# Altium PCB PCB_OpenT12_精简_2021-10-22.pcbdoc
Units mil, origin at the board's own origin, x right, y up, seen from the top; angles counter-clockwise.
Board outline 4690 x 3345 mil, 2 copper layers (Top Layer, Bottom Layer); 92 components, 71 nets, 286 pads, 36 vias.
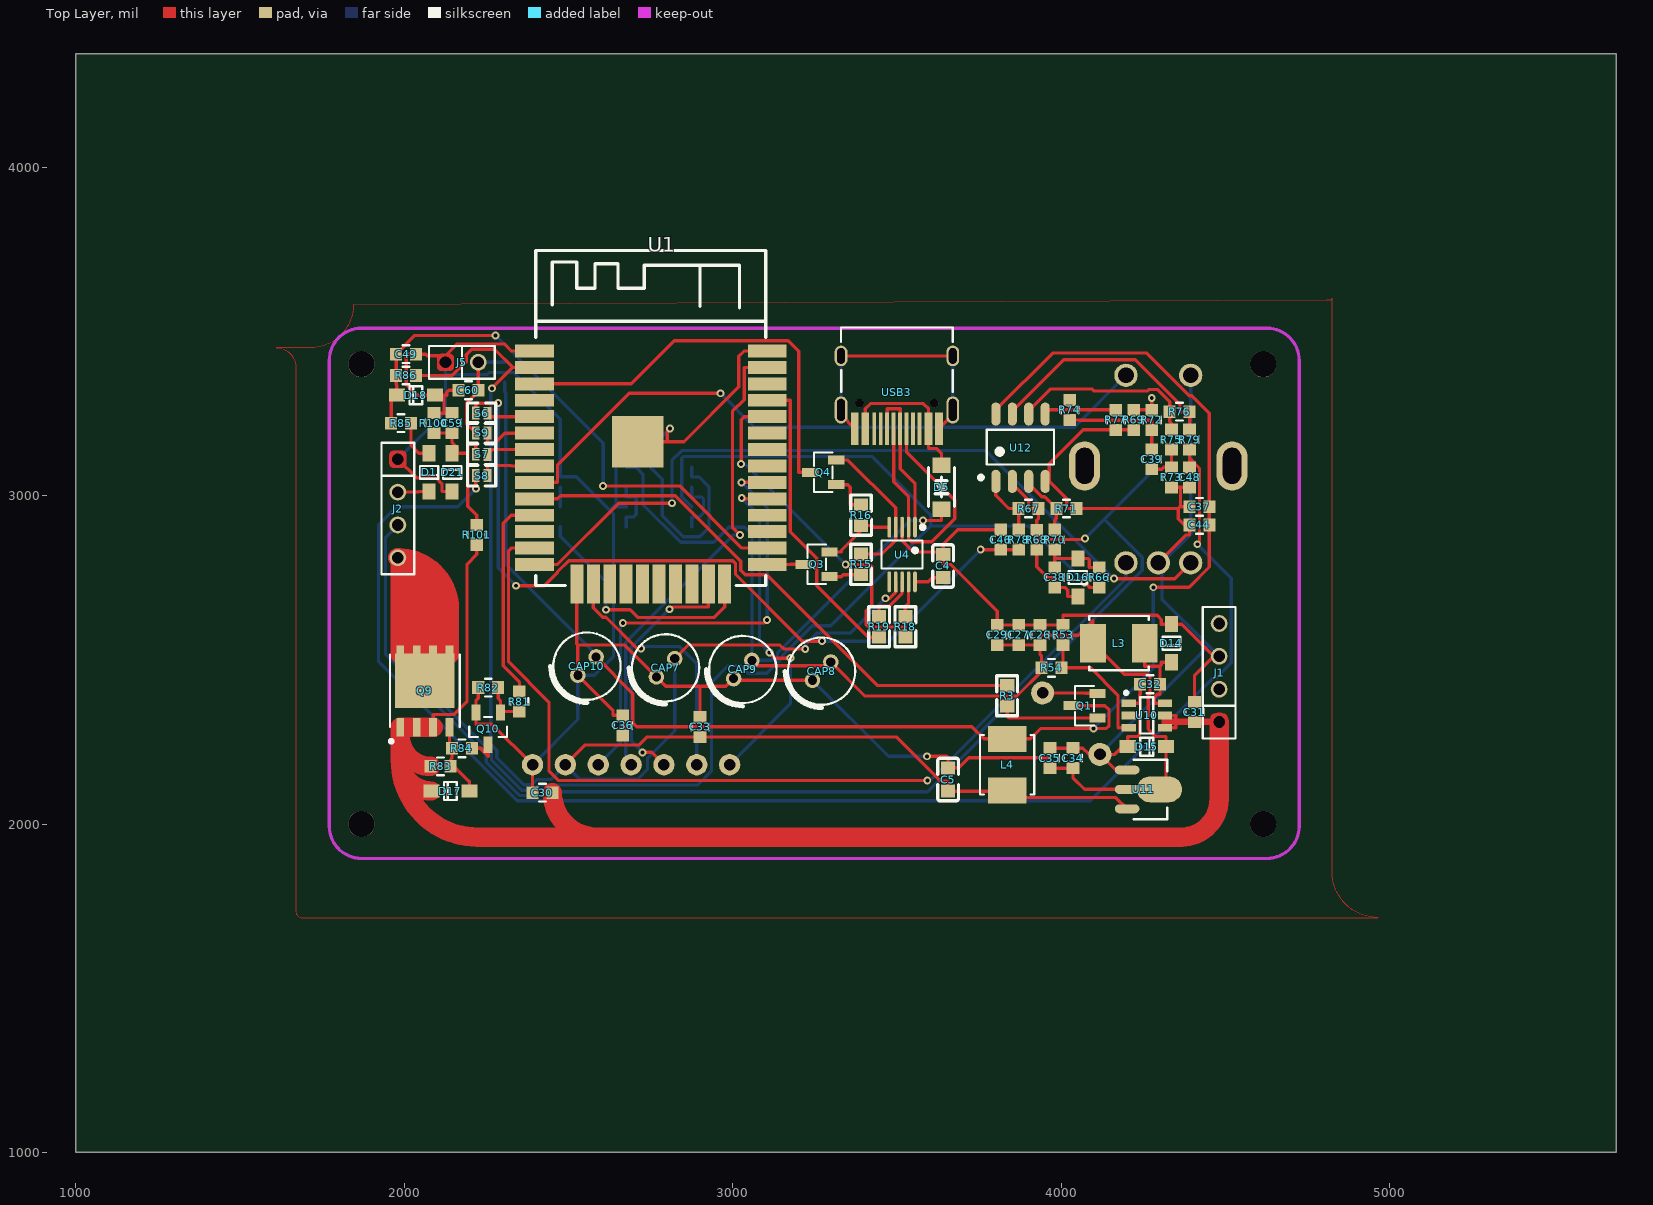
[diagram p0: Top Layer view]
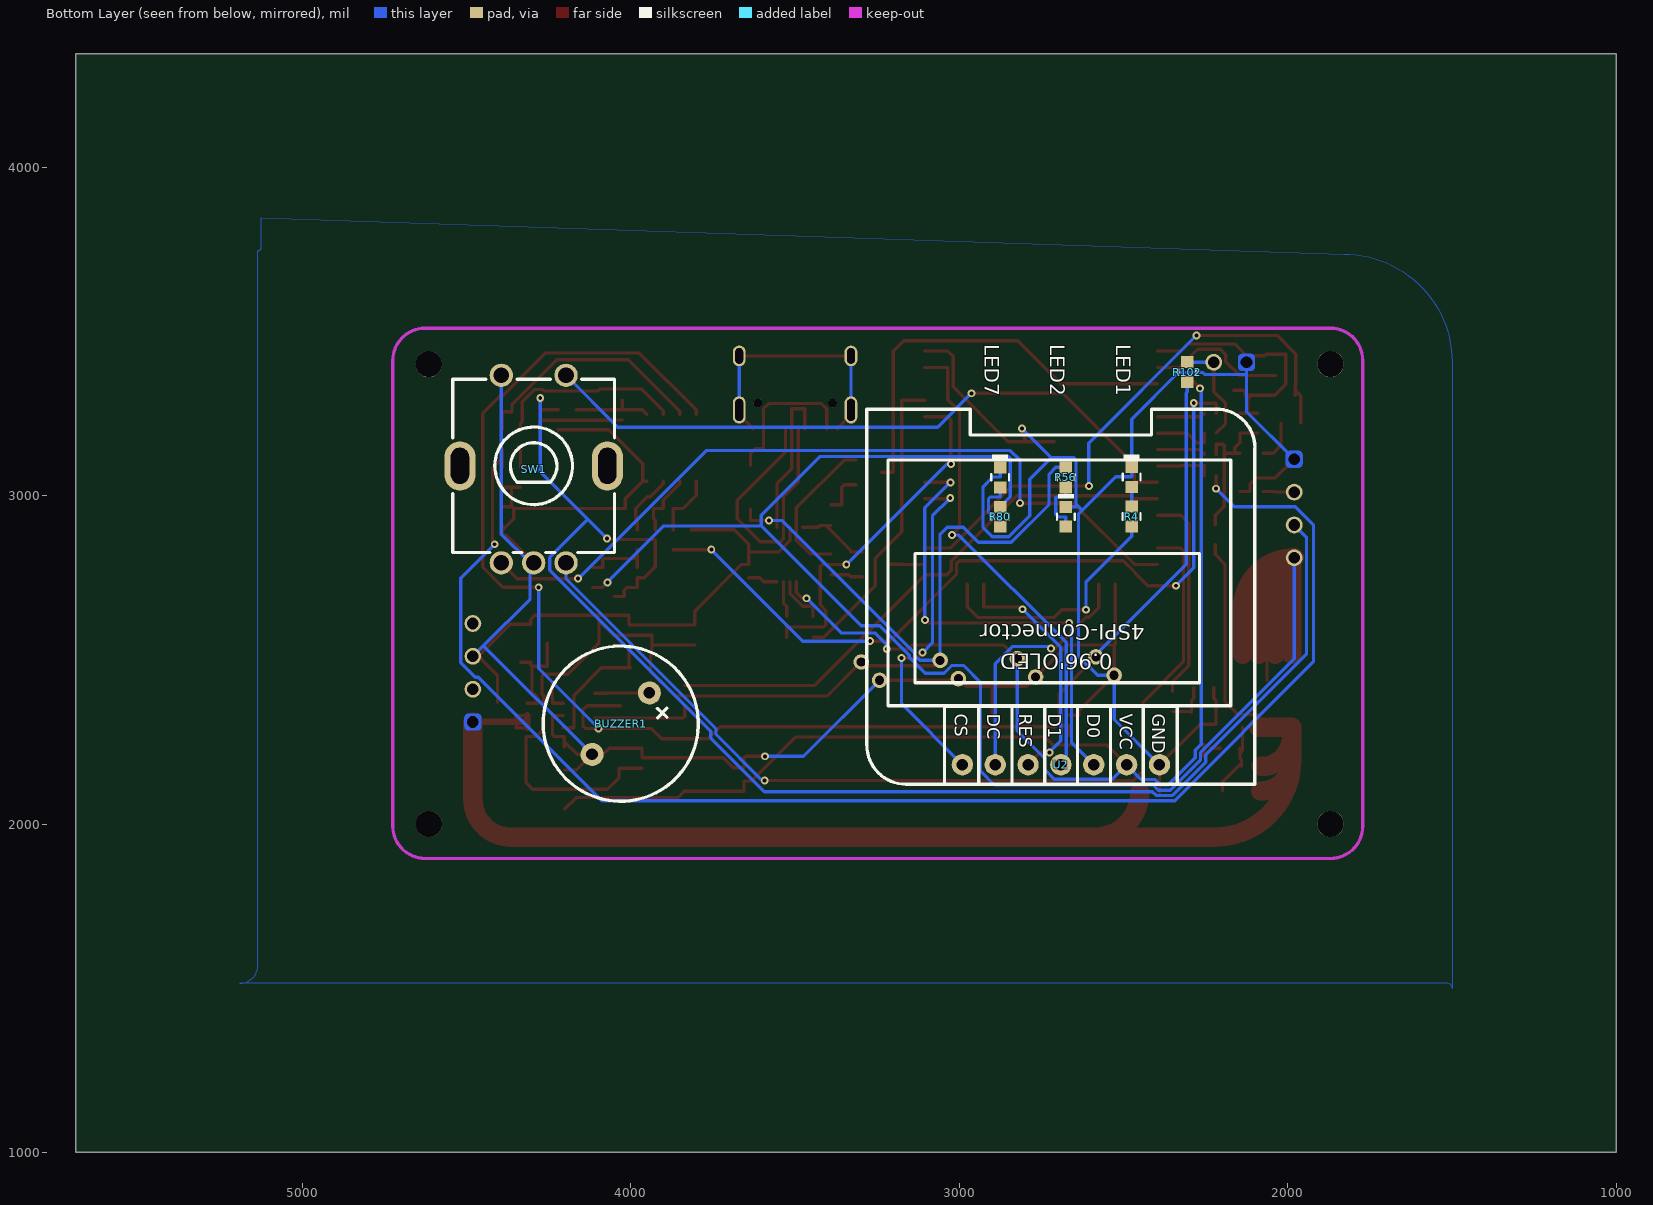
[diagram p1: Bottom Layer view, seen from below]

## Layer stack, top to bottom
Top Layer: signal copper (thickness not stored)
Dielectric: dielectric 12.6, FR-4, Dk 4.8
Bottom Layer: signal copper (thickness not stored)

## Board outline
5690,1000 1000,1000 1000,4345 5690,4345

## Components (designator, comment, footprint, x,y, rotation, side; value= is the part's Value field where it differs from the comment)
BUZZER1 "GMC1205YA-16R2048" BUZ-TH_BD12.0-P6.50-D0.6-FD 4030.78,2305.4 r133 bottom
C4 "1u" C0603 3640.78,2785.4 r90 top
C5 "10u" C0603 3655.78,2135.4 r270 top
C26 "10uF" LC-0603-C 3935.78,2575.4 r90 top
C27 "10uF" LC-0603-C 3870.78,2575.4 r90 top
C29 "0.1uF" LC-0603-C 3805.78,2575.4 r90 top
C30 "4.7uF" LC-0603-C 2420.78,2095.4 r180 top
C31 "0.1uF" LC-0603-C 4405.78,2340.4 r90 top
C32 "0.1uF" LC-0603-C 4270.78,2425.4 r180 top
C33 "0.1uF" LC-0603-C 2900.78,2295.4 r270 top
C34 "0.1uF" LC-0603-C 4035.78,2200.4 r270 top
C35 "0.1uF" LC-0603-C 3965.78,2200.4 r90 top
C36 "0.1uF" LC-0603-C 2665.78,2300.4 r270 top
C37 "0.1uF" LC-0603-C 4420.78,2965.4 r0 top
C38 "0.1uF" LC-0603-C 3980.78,2750.4 r270 top
C39 "0.1uF" LC-0603-C 4275.78,3110.4 r270 top
C44 "4.7uF" LC-0603-C 4420.78,2910.4 r0 top
C46 "10nF" LC-0603-C 3815.78,2865.4 r90 top
C48 "10nF" LC-0603-C 4390.78,3055.4 r270 top
C49 "0.1uF" LC-0603-C 2005.78,3430.4 r180 top
C59 "1uF" LC-0603-C 2145.78,3220.4 r90 top
C60 "1uF" LC-0603-C 2195.78,3320.4 r180 top
CAP7 "22uF" CAPX-5.0 2795.78,2475.4 r45 top
CAP8 "22uF" CAPX-5.0 3270.78,2465.4 r45 top
CAP9 "100uF" CAPX-5.0 3030.78,2470.4 r45 top
CAP10 "22uF" CAPX-5.0 2556.46,2480.72 r45 top
D1 "1N4148" LC-SOD-123 2075.78,3070.4 r90 top
D5 "1N5819HW-7-F" SOD-123_L2.8-W1.8-LS3.7-FD 3635.78,3025.4 r270 top
D14 "B5819" LC-SOD-123 4335.78,2550.4 r90 top
D15 "SMA6.0A" LC-SOD-123 4260.78,2235.4 r180 top
D16 "1N4148" LC-SOD-123 4050.78,2750.4 r90 top
D17 "ZMM12" LC-SOD-123 2140.78,2100.4 r0 top
D18 "SMF3.3A" LC-SOD-123 2035.78,3305.4 r0 top
D21 "SMF3.3A" LC-SOD-123 2145.78,3070.4 r270 top
J1 "CONN4" SIP-4 4480.78,2310.4 r90 top
J2 "CONN4" SIP-4 1980.78,3110.4 r270 top
J5 "NTC 10K" SIP-2 2125.78,3405.4 r0 top
L3 "22uH" LIN0520 4175.78,2550.4 r180 top
L4 "22uH" LIN0520 3835.78,2180.4 r90 top
LED1 "LED" LC-0603-LED 2475.38,3055.8 r90 bottom
LED2 "LED" LC-0603-LED 2675.78,2935.4 r90 bottom
LED7 "LED" LC-0603-LED 2875.78,3055.4 r90 bottom
Q1 "S8050" SOT-23-3_L2.9-W1.3-P1.90-LS2.4-BR 4070.78,2360.4 r0 top
Q3 "S8050" SOT-23-3_L2.9-W1.3-P1.90-LS2.4-BR 3255.78,2790.4 r0 top
Q4 "S8050" SOT-23-3_L2.9-W1.3-P1.90-LS2.4-BR 3275.78,3070.4 r0 top
Q9 "NCE40P13" DFN8-5*6 2063.1,2405.4 r0 top
Q10 "S8050" LC-SOT-23(SOT-23-3) 2255.78,2290.4 r90 top
R3 "10k" R0603 3835.78,2390.4 r90 top
R4 "2K" LC-0603-R#1 2475.42,2935.76 r90 bottom
R15 "10k" R0603 3390.78,2790.4 r90 top
R16 "10k" R0603 3390.78,2940.4 r270 top
R18 "220R" R0603 3525.78,2600.4 r270 top
R19 "220R" R0603 3445.78,2600.4 r270 top
R53 "2K" LC-0603-R#2 4005.78,2575.4 r270 top
R54 "10K" LC-0603-R#2 3970.78,2475.4 r180 top
R56 "3K" LC-0603-R#1 2675.78,3055.4 r270 bottom
R66 "10K" LC-0603-R#2 4115.78,2750.4 r90 top
R67 "200K" LC-0603-R#2 3900.78,2960.4 r180 top
R68 "2K" LC-0603-R#2 3925.78,2865.4 r270 top
R69 "0.02R" LC-0603-R#2 4220.78,3230.4 r270 top
R70 "2K" LC-0603-R#2 3980.78,2865.4 r90 top
R71 "200K" LC-0603-R#2 4015.78,2960.4 r0 top
R72 "10R" LC-0603-R#2 4275.78,3230.4 r90 top
R73 "10R" LC-0603-R#2 4335.78,3055.4 r270 top
R74 "1K" LC-0603-R#2 4025.78,3260.4 r90 top
R75 "1K" LC-0603-R#2 4335.78,3170.4 r90 top
R76 "20K" LC-0603-R#2 4360.78,3255.4 r180 top
R77 "20K" LC-0603-R#2 4165.78,3230.4 r270 top
R78 "1K" LC-0603-R#2 3870.78,2865.4 r90 top
R79 "10K" LC-0603-R#2 4390.78,3170.4 r90 top
R80 "10K" LC-0603-R#1 2875.78,2935.4 r90 bottom
R81 "1K" LC-0603-R#2 2350.78,2372.72 r270 top
R82 "51K" LC-0603-R#2 2255.78,2415.4 r0 top
R83 "10K" LC-0603-R#2 2110.78,2175.4 r180 top
R84 "2K" LC-0603-R#2 2175.78,2230.4 r180 top
R85 "1K" LC-0603-R#2 1990.78,3220.4 r180 top
R86 "10K" LC-0603-R#2 2005.78,3365.4 r180 top
R100 "1K" LC-0603-R#2 2090.78,3220.4 r270 top
R101 "10K" LC-0603-R#2 2220.78,2880.4 r270 top
R102 "10K" LC-0603-R#1 2305.78,3375.4 r90 bottom
S6 "Solder" SW_HAND_WELD_JX 2235.78,3250.4 r180 top
S7 "Solder" SW_HAND_WELD_JX 2235.78,3125.4 r180 top
S8 "Solder" SW_HAND_WELD_JX 2235.78,3060.4 r180 top
S9 "Solder" SW_HAND_WELD_JX 2235.78,3190.4 r180 top
SW1 "Rotary Enc" SW-TH_PEC11R-4XXXF-SXXXX 4295.78,3080.4 r0 bottom
U1 "ESP32-S" WIRELM-SMD_ESP32-S 2750.78,3085.4 r0 top
U2 "0.96OLED" "OLED 12864 SPI 7P" 2690.78,2180.4 r180 bottom
U4 "CH340E" MSOP-10_L3.0-W3.0-P0.50-LS5.0-BL 3515.78,2820.4 r180 top
U10 "HT7463B" LC-SOT-23-6 4260.78,2330.4 r180 top
U11 "HT7533" LC-SOT-89 4200.78,2105.4 r180 top
U12 "GS8552" LC-SOP-8-150MIL 3875.78,3145.4 r0 top
USB3 "USB-TYPEC-16P" USB-TYPE-C-16P 3670,3425 r180 top

## Footprints (in the part's own frame and the unit in brackets; to place one, negate y for a bottom-side part, rotate by r counter-clockwise, add the part's x,y. Pads: shape width x height; smd on the part's side, far side on the other; paste and mask are expansions set on the pad)
BUZ-TH_BD12.0-P6.50-D0.6-FD [mil]
  round 70 hole 35.4: 1(128,0) 2(-128,0)
  silkscreen extent -236,-236 236,236
C0603 [mm]
  rect 1x1.1 smd: 1(-0.9,0) 2(0.9,0)
  silkscreen extent -1.65,-0.8 1.65,0.8
CAPX-5.0 [mm]
  round 1.2 hole 0.7: 1(1,0) 2(-1,0)
  silkscreen extent -2.83,-2.6 2.6,2.6
DFN8-5*6 [mm]
  rect 0.6x1.4 smd: 1(-1.905,-2.816) 2(-0.635,-2.816) 3(0.635,-2.816) 4(1.905,-2.816) 5(1.905,2.816) 6(0.635,2.816) 7(-0.635,2.816) 8(-1.905,2.816)
  rect 4.6x4.2 smd: 5(0,0.791)
  silkscreen extent -2.7,-4 2.7,2.8
LC-0603-C [mm]
  rect 0.93x0.98 smd: 1(-0.77,0) 2(0.77,0)
  silkscreen extent -0.25,-0.69 0.25,0.69
LC-0603-LED [mm]
  rect 0.93x0.98 smd: A(-0.77,0) K(0.77,0)
  silkscreen extent -0.25,-0.69 1.72,0.69
LC-0603-R#1 [mm]
  rect 0.93x0.98 smd: 1(0.77,0) 2(-0.77,0)
  silkscreen extent -0.25,-0.69 0.25,0.69
LC-0603-R#2 [mm]
  rect 0.93x0.98 smd: 1(-0.77,0) 2(0.77,0)
  silkscreen extent -0.25,-0.69 0.25,0.69
LC-SOD-123 [mm]
  rect 1.25x1 smd: 1(1.475,0) 2(-1.475,0)
  silkscreen extent -0.5,-0.7 0.5,0.7
LC-SOP-8-150MIL [mm]
  oval 0.7x1.8 smd: 1(-1.893,-2.6) 2(-0.623,-2.6) 3(0.647,-2.6) 4(1.917,-2.6) 5(1.917,2.6) 6(0.647,2.6) 7(-0.623,2.6) 8(-1.893,2.6)
  silkscreen extent -3.2,-2.45 2.6,1.4
LC-SOT-23(SOT-23-3) [mm]
  rect 1.25x0.7 smd: 1(1.25,-0.95) 2(1.25,0.95) 3(-1.25,0)
  silkscreen extent -0.65,-1.46 0.9,1.46
LC-SOT-23-6 [mm]
  rect 1.1x0.6 smd: 1(1.4,-0.95) 2(1.4,0) 3(1.4,0.95) 4(-1.4,0.95) 5(-1.4,0) 6(-1.4,-0.95)
  silkscreen extent -0.5,-1.88 1.73,1.4
LC-SOT-89 [mm]
  oval 1.9x0.7 smd: 1(0,-1.5) 3(0,1.5)
  oval 3.5x2 smd: 2(-2.5,0)
  oval 2.1x0.7 smd: 2(-0.1,0)
  silkscreen extent -3.1,-2.3 -0.5,2.3
LIN0520 [mm]
  rect 2x3 smd: 1(-2,0) 2(2,0)
  silkscreen extent -2.3,-2.1 2.3,2.1
MSOP-10_L3.0-W3.0-P0.50-LS5.0-BL [mm]
  oval 0.28x1.62 smd: 1(-1,-2.11) 2(-0.5,-2.11) 3(0,-2.11) 4(0.5,-2.11) 5(1,-2.11) 6(1,2.11) 7(0.5,2.11) 8(0,2.11) 9(-0.5,2.11) 10(-1,2.11)
  silkscreen extent -1.74,-2.26 1.58,1.07
"OLED 12864 SPI 7P" [mm]
  round 1.65 hole 0.89: 1(7.619,-0.001) 2(5.079,0.004) 3(2.539,0.004) 4(-0.001,-0.004) 5(-2.539,0.001) 6(-5.079,0.001) 7(-7.619,0.004)
  silkscreen extent -15,-1.5 15,27.5
R0603 [mm]
  rect 1x1.1 smd: 1(-0.8,0) 2(0.8,0)
  silkscreen extent -1.55,-0.8 1.55,0.81
SIP-2 [mm]
  round 0 hole 0.9: 1(0,0)
  round 1.3 hole 0.9: 2(2.54,0)
  Top Layer region: -0.65,0.325 -0.649,0.349 -0.646,0.373 -0.642,0.397 -0.636,0.421 -0.628,0.444 -0.618,0.466 -0.606,0.488 -0.594,0.508 -0.579,0.528 -0.563,0.546 -0.546,0.563 -0.528,0.579 -0.508,0.594 -0.488,0.606 -0.466,0.618 -0.444,0.628 -0.421,0.636 -0.397,0.642 -0.373,0.646 -0.349,0.649 -0.325,0.65 0.325,0.65 0.349,0.649 0.373,0.646 0.397,0.642 0.421,0.636 0.444,0.628 0.466,0.618 0.488,0.606 0.508,0.594 0.528,0.579 0.546,0.563 0.563,0.546 0.579,0.528 0.594,0.508 0.606,0.488 0.618,0.466 0.628,0.444 0.636,0.421 0.642,0.397 0.646,0.373 0.649,0.349 0.65,0.325 0.65,-0.325 0.649,-0.349 0.646,-0.373 0.642,-0.397 0.636,-0.421 0.628,-0.444 0.618,-0.466 0.606,-0.488 0.594,-0.508 0.579,-0.528 0.563,-0.546 0.546,-0.563 0.528,-0.579 0.508,-0.594 0.488,-0.606 0.466,-0.618 0.444,-0.628 0.421,-0.636 0.397,-0.642 0.373,-0.646 0.349,-0.649 0.325,-0.65 -0.325,-0.65 -0.349,-0.649 -0.373,-0.646 -0.397,-0.642 -0.421,-0.636 -0.444,-0.628 -0.466,-0.618 -0.488,-0.606 -0.508,-0.594 -0.528,-0.579 -0.546,-0.563 -0.563,-0.546 -0.579,-0.528 -0.594,-0.508 -0.606,-0.488 -0.618,-0.466 -0.628,-0.444 -0.636,-0.421 -0.642,-0.397 -0.646,-0.373 -0.649,-0.349 -0.65,-0.325
  Bottom Layer region: -0.65,0.325 -0.649,0.349 -0.646,0.373 -0.642,0.397 -0.636,0.421 -0.628,0.444 -0.618,0.466 -0.606,0.488 -0.594,0.508 -0.579,0.528 -0.563,0.546 -0.546,0.563 -0.528,0.579 -0.508,0.594 -0.488,0.606 -0.466,0.618 -0.444,0.628 -0.421,0.636 -0.397,0.642 -0.373,0.646 -0.349,0.649 -0.325,0.65 0.325,0.65 0.349,0.649 0.373,0.646 0.397,0.642 0.421,0.636 0.444,0.628 0.466,0.618 0.488,0.606 0.508,0.594 0.528,0.579 0.546,0.563 0.563,0.546 0.579,0.528 0.594,0.508 0.606,0.488 0.618,0.466 0.628,0.444 0.636,0.421 0.642,0.397 0.646,0.373 0.649,0.349 0.65,0.325 0.65,-0.325 0.649,-0.349 0.646,-0.373 0.642,-0.397 0.636,-0.421 0.628,-0.444 0.618,-0.466 0.606,-0.488 0.594,-0.508 0.579,-0.528 0.563,-0.546 0.546,-0.563 0.528,-0.579 0.508,-0.594 0.488,-0.606 0.466,-0.618 0.444,-0.628 0.421,-0.636 0.397,-0.642 0.373,-0.646 0.349,-0.649 0.325,-0.65 -0.325,-0.65 -0.349,-0.649 -0.373,-0.646 -0.397,-0.642 -0.421,-0.636 -0.444,-0.628 -0.466,-0.618 -0.488,-0.606 -0.508,-0.594 -0.528,-0.579 -0.546,-0.563 -0.563,-0.546 -0.579,-0.528 -0.594,-0.508 -0.606,-0.488 -0.618,-0.466 -0.628,-0.444 -0.636,-0.421 -0.642,-0.397 -0.646,-0.373 -0.649,-0.349 -0.65,-0.325
  silkscreen extent -1.27,-1.27 3.81,1.27
SIP-4 [mm]
  round 0 hole 0.9: 1(0,0)
  round 1.3 hole 0.9: 2(2.54,0) 3(5.08,0) 4(7.62,0)
  Top Layer region: -0.65,0.325 -0.649,0.349 -0.646,0.373 -0.642,0.397 -0.636,0.421 -0.628,0.444 -0.618,0.466 -0.606,0.488 -0.594,0.508 -0.579,0.528 -0.563,0.546 -0.546,0.563 -0.528,0.579 -0.508,0.594 -0.488,0.606 -0.466,0.618 -0.444,0.628 -0.421,0.636 -0.397,0.642 -0.373,0.646 -0.349,0.649 -0.325,0.65 0.325,0.65 0.349,0.649 0.373,0.646 0.397,0.642 0.421,0.636 0.444,0.628 0.466,0.618 0.488,0.606 0.508,0.594 0.528,0.579 0.546,0.563 0.563,0.546 0.579,0.528 0.594,0.508 0.606,0.488 0.618,0.466 0.628,0.444 0.636,0.421 0.642,0.397 0.646,0.373 0.649,0.349 0.65,0.325 0.65,-0.325 0.649,-0.349 0.646,-0.373 0.642,-0.397 0.636,-0.421 0.628,-0.444 0.618,-0.466 0.606,-0.488 0.594,-0.508 0.579,-0.528 0.563,-0.546 0.546,-0.563 0.528,-0.579 0.508,-0.594 0.488,-0.606 0.466,-0.618 0.444,-0.628 0.421,-0.636 0.397,-0.642 0.373,-0.646 0.349,-0.649 0.325,-0.65 -0.325,-0.65 -0.349,-0.649 -0.373,-0.646 -0.397,-0.642 -0.421,-0.636 -0.444,-0.628 -0.466,-0.618 -0.488,-0.606 -0.508,-0.594 -0.528,-0.579 -0.546,-0.563 -0.563,-0.546 -0.579,-0.528 -0.594,-0.508 -0.606,-0.488 -0.618,-0.466 -0.628,-0.444 -0.636,-0.421 -0.642,-0.397 -0.646,-0.373 -0.649,-0.349 -0.65,-0.325
  Bottom Layer region: -0.65,0.325 -0.649,0.349 -0.646,0.373 -0.642,0.397 -0.636,0.421 -0.628,0.444 -0.618,0.466 -0.606,0.488 -0.594,0.508 -0.579,0.528 -0.563,0.546 -0.546,0.563 -0.528,0.579 -0.508,0.594 -0.488,0.606 -0.466,0.618 -0.444,0.628 -0.421,0.636 -0.397,0.642 -0.373,0.646 -0.349,0.649 -0.325,0.65 0.325,0.65 0.349,0.649 0.373,0.646 0.397,0.642 0.421,0.636 0.444,0.628 0.466,0.618 0.488,0.606 0.508,0.594 0.528,0.579 0.546,0.563 0.563,0.546 0.579,0.528 0.594,0.508 0.606,0.488 0.618,0.466 0.628,0.444 0.636,0.421 0.642,0.397 0.646,0.373 0.649,0.349 0.65,0.325 0.65,-0.325 0.649,-0.349 0.646,-0.373 0.642,-0.397 0.636,-0.421 0.628,-0.444 0.618,-0.466 0.606,-0.488 0.594,-0.508 0.579,-0.528 0.563,-0.546 0.546,-0.563 0.528,-0.579 0.508,-0.594 0.488,-0.606 0.466,-0.618 0.444,-0.628 0.421,-0.636 0.397,-0.642 0.373,-0.646 0.349,-0.649 0.325,-0.65 -0.325,-0.65 -0.349,-0.649 -0.373,-0.646 -0.397,-0.642 -0.421,-0.636 -0.444,-0.628 -0.466,-0.618 -0.488,-0.606 -0.508,-0.594 -0.528,-0.579 -0.546,-0.563 -0.563,-0.546 -0.579,-0.528 -0.594,-0.508 -0.606,-0.488 -0.618,-0.466 -0.628,-0.444 -0.636,-0.421 -0.642,-0.397 -0.646,-0.373 -0.649,-0.349 -0.65,-0.325
  silkscreen extent -1.27,-1.27 8.89,1.27
SOD-123_L2.8-W1.8-LS3.7-FD [mm]
  rect 1.2x1.4 smd: 1(-1.7,0) 2(1.7,0)
  silkscreen extent -1.5,-1 1.5,1
SOT-23-3_L2.9-W1.3-P1.90-LS2.4-BR [mm]
  rect 1.25x0.7 smd: 1(1,-0.95) 2(1,0.95) 3(-1,0)
  silkscreen extent -0.73,-1.53 0.73,1.53
SW-TH_PEC11R-4XXXF-SXXXX [mm]
  round 1.8 hole 1.2: 1(2.5,-7.25) 2(-2.5,-7.25) A(2.5,7.25) B(-2.5,7.25) C(0,7.25)
  oval 2.4x3.8 hole 1.4 slot 2.8 at 90 deg: MT1(5.7,-0.25) MT2(-5.7,-0.25)
  silkscreen extent -6.25,-6.95 6.25,6.45
SW_HAND_WELD_JX [mm]
  rect 0.6x1 smd: 1(-0.45,0.002) 2(0.45,-0.003)
  silkscreen extent -1.1,-0.8 1.1,0.8
USB-TYPE-C-16P [mm]
  oval 1x2.1 hole 0.6 slot 1.7 at 90 deg: 0(0,4.18) 0(8.64,4.18)
  oval 1x1.6 hole 0.6 slot 1.2 at 90 deg: 0(0,0) 0(8.64,0)
  rect 0.6x2.5 smd: A1(1.07,5.625) A4(1.87,5.625) A9(6.77,5.625) A12(7.57,5.625)
  rect 0.3x2.5 smd: A5(3.07,5.625) A6(4.07,5.625) A7(4.57,5.625) A8(5.57,5.625) B5(6.07,5.625) B6(5.07,5.625) B7(3.57,5.625) B8(2.57,5.625)
  round 0.65 hole 0.65 slot 0.655 at 90 deg: G(1.43,3.65) G(7.21,3.65)
  silkscreen extent -0.01,-2.2 8.64,2.79
WIRELM-SMD_ESP32-S [mm]
  rect 3x1 smd: 1(-9,9.005) 2(-9,7.735) 3(-9,6.465) 4(-9,5.195) 5(-9,3.925) 6(-9,2.655) 7(-9,1.385) 8(-9,0.115) 9(-9,-1.155) 10(-9,-2.425) 11(-9,-3.695) 12(-9,-4.965) 13(-9,-6.235) 14(-9,-7.505) 25(9,-7.505) 26(9,-6.235) 27(9,-4.965) 28(9,-3.695) 29(9,-2.425) 30(9,-1.155) 31(9,0.115) 32(9,1.385) 33(9,2.655) 34(9,3.925) 35(9,5.195) 36(9,6.465) 37(9,7.735) 38(9,9.005)
  rect 1x3 smd: 15(-5.715,-9.005) 16(-4.445,-9.005) 17(-3.175,-9.005) 18(-1.905,-9.005) 19(-0.635,-9.005) 20(0.635,-9.005) 21(1.905,-9.005) 22(3.175,-9.005) 23(4.445,-9.005) 24(5.715,-9.005)
  rect 4x4 smd: 39(-1,1.995)
  silkscreen extent -8.89,-9.13 8.89,16.78

## Free pads (board coordinates)
  round 80 hole 80 unplated: ""(1870,2000) ""(1870,3400) ""(4615,2000) ""(4615,3400)

## Via types
v1: diameter 24.02, hole 12.01, Top Layer to Bottom Layer, 36 vias

## Nets (pads, with @x,y where several pads share a name; then routed paths per layer and width w, separated by ;. In a path a pad name is that pad's centre, name@x,y a point inside that pad or via, vN(x,y) a via of type N, cw(c..) or ccw(c..) an arc to the next point about the centre after c; other vN are vias at no path point)
5V: C26.1 C27.1 C29.1 C34.2 C35.1 CAP8.1 CAP9.1 D5.2 D15.2 L3.2 R54.2 R56.2 U11.2 | length 4180.4
  Top Layer w10: CAP9.1 3075.09,2481.77 3287.15,2481.77 CAP8.1 3402.19,2389.67 3865.58,2389.67 3940.46,2464.55 R54.2 3940.46,2511.03 3935.78,2515.71 C26.1 ; v1(3579.34,2923.78) 3635.78,2923.78 D5.2 ; C29.1 C27.1 C26.1 ; C35.1 3996.14,2170.09 C34.2 4035.78,2140.7 4071.08,2105.4 4204.72,2105.4 4299.21,2105.4 4318.85,2125.04 4318.85,2235.4 4318.85,2266.16 4288.09,2266.16 4265.12,2289.13 4265.12,2390.8 4270.75,2396.43 4270.75,2449.2 4264.18,2455.77 4191.67,2455.77 L3.2 4097.04,2618.71 4052.8,2574.47 3935.78,2574.47 C26.1
  Bottom Layer w10: R56.2 2706.14,3085.72 2726.94,3064.92 2726.94,2972.66 2842.04,2857.56 2941.97,2857.56 2988.05,2903.64 3037.08,2903.64 3058.62,2882.1 CAP9.1 3121.2,2498.24 3136.7,2513.74 3136.7,2521.08 3539.4,2923.78 v1(3579.34,2923.78)
AVCC: C36.2 C37.2 C44.2 CAP10.1 L4.2 Q1.3 R102.2 U12.8 | length 4897.4
  Top Layer w10: CAP10.1 2696.15,2396.71 2696.15,2307.8 ; C36.2 2665.78,2299.46 2687.81,2299.46 2696.15,2307.8 ; U12.8 3801.26,3260.92 3974.01,3433.67 4260.34,3433.67 4390.32,3303.69 4398.03,3303.69 4451.1,3250.62 C37.2 C44.2 4451.1,2782.31 4389.38,2720.59 v1(4280.49,2720.59) ; Q1.3 4133.3,2360.4 4145.84,2347.86 4145.84,2298.92 4137.67,2290.75 v1(4097.88,2290.75) 3937.52,2290.75 3905.91,2259.14 L4.2 3809.59,2259.14 3765.66,2259.14 3728.48,2296.32 2707.63,2296.32 2696.15,2307.8
  Bottom Layer w10: R102.2 2305.78,3315.7 2309.38,3312.1 2309.38,2790.66 2584.3,2515.74 CAP10.1 ; v1(4097.88,2290.75) 4280.49,2473.36 v1(4280.49,2720.59)
BEEP: R3.2 U1.10 | length 1698.8
  Top Layer w10: U1.10@2396.45,2989.93 2466.57,2989.93 2476.24,2999.6 2824.8,2999.6 3024.78,2799.62 3024.78,2772.09 3038.23,2758.64 3103.25,2758.64 3439.99,2421.9 R3.2
C32_2: C32.2 U10.1 | length 91.2
  Top Layer w10: U10.1 4238.38,2367.8 4238.38,2392.96 4240.46,2395.04 C32.2
C38_1: C38.1 D16.1 R66.2 R70.1 | length 214.9
  Top Layer w10: C38.1 3980.78,2808.47 ; R70.1 3980.78,2808.47 ; R66.2 4085.42,2780.72 4085.42,2804.59 4081.54,2808.47 4066.16,2808.47 D16.1 3980.78,2808.47
C39_1: C39.1 R72.1 R74.1 | length 339
  Top Layer w10: R74.1 4056.14,3230.09 4056.76,3229.47 4275.78,3229.47 R72.1 C39.1
C39_2: C39.2 R73.1 R75.1 | length 116.7
  Top Layer w10: C39.2 4306.14,3080.08 4311.77,3085.71 R73.1 R75.1
CC1: USB3.A5
CC2: USB3.B5
CS: U1.29 U2.7 | length 1055.7
  Top Layer w10: v1(3027.56,2992.03) 3032.88,2992.03 3034.98,2989.93 U1.29 ; v1(3111.62,2521.85) 3128.62,2504.85 v1(3175.87,2504.85)
  Bottom Layer w10: U2.7 3175.87,2365.69 v1(3175.87,2504.85) ; v1(3027.56,2992.03) 3081.87,2937.72 3081.87,2551.6 v1(3111.62,2521.85)
CUR_ADC_PIN: C48.1 R79.1 S8.2 | length 4477.7
  Top Layer w10: v1(2218.06,3020.7) S8.2 ; C48.1 4390.78,3112.9 ; R79.1 4390.78,3112.9 ; v1(4414.37,2851.61) 4421.15,2858.39 4421.15,3082.53 4390.78,3112.9
  Bottom Layer w10: v1(2218.06,3020.7) 2163.46,2966.1 1976.94,2966.1 1921.97,2911.13 1921.97,2493.23 2344.28,2070.92 4088.09,2070.92 4464.24,2447.07 4473.17,2447.07 4517.45,2491.35 4517.45,2748.53 v1(4414.37,2851.61)
DTR: Q3.2 R16.2 U4.5 | length 236.3
  Top Layer w10: Q3.2@3295.15,2827.8 3330.83,2827.8 3330.83,2832.6 R16.2@3407.14,2908.91 ; R16.2 R16.2@3407.14,2908.91 ; U4.5 3428.94,2903.47 3423.5,2908.91 R16.2@3407.14,2908.91
DVCC: C5.2 C33.2 CAP7.1 L4.1 R86.1 U1.2 U2.2 U4.7 U11.3 | length 5323.9
  Top Layer w10: R86.1 2146.99,3365.4 2189.11,3407.52 2189.11,3429.17 2205.21,3445.27 2275.01,3445.27 2330.35,3389.93 ; v1(2266.82,3326.4) 2330.35,3389.93 ; U1.2@2396.45,3389.93 2330.35,3389.93 ; U2.2 2550.97,2240.69 2715.91,2240.69 2740.3,2265.08 C33.2 3498.37,2265.08 3632.73,2130.72 3655.78,2130.72 C5.2 3744.94,2099.97 ; CAP7.1 2865.31,2544.93 3143.61,2544.93 3155.63,2532.91 v1(3220.98,2532.91) ; v1(3464.71,2687.07) 3478.18,2687.07 3496.09,2704.98 U4.7 ; L4.1 3834.09,2099.97 3744.94,2099.97 ; U11.3 4166.58,2080.54 3856.39,2080.54 3836.96,2099.97 3744.94,2099.97
  Bottom Layer w10: v1(2266.82,3326.4) 2263.22,3322.8 2263.22,2243.02 2281.67,2224.57 2281.67,2201.81 2364.29,2119.19 2387.67,2119.19 2403.76,2135.28 2445.56,2135.28 U2.2 2534.85,2136.53 2711.21,2136.53 2740.69,2166.01 2740.69,2200.18 2823.62,2283.11 CAP7.1 ; v1(3220.98,2532.91) 3220.98,2545.17 3257.38,2581.57 3359.21,2581.57 v1(3464.71,2687.07)
EN: Q4.3 U1.3 | length 1275.7
  Top Layer w10: U1.3@2396.45,3339.93 2691.05,3339.93 2821.82,3470.7 3168.74,3470.7 3200.73,3438.71 3200.73,3070.4 Q4.3
GND: BUZZER1.2 C4.2 C5.1 C26.2 C27.2 C29.2 C30.2 C31.2 C33.1 C34.1 C35.2 C36.1 C37.1 C44.1 C46.2 C48.2 C49.1 C59.2 C60.2 CAP7.2 CAP8.2 CAP9.2 CAP10.2 D14.1 D15.1 D18.1 D21.1 J1.3 J2.1 J5.1 LED1.K LED2.K LED7.K Q10.2 R53.1 R69.2 R71.2 R73.2 R77.2 R82.1 R100.1 SW1.1 SW1.C U1.1 U1.15 U1.38 U1.39 U2.1 U4.3 U10.2 U11.1 U12.4 | length 12157.6
  Top Layer w10: J2.1 2037.63,3053.55 2096.87,3053.55 2115.03,3035.39 2115.03,3012.33 D21.1 ; R100.1 2121.14,3250.71 ; J5.1 2125.78,3425.34 ; C59.2 2121.14,3250.72 ; C60.2 2136.08,3320.4 2129.53,3313.85 2129.53,3305.4 D18.1@2111.69,3305.4 ; R82.1 2225.47,2382.38 2218.38,2375.29 Q10.2 2218.38,2303.93 2267.25,2303.93 U2.1 2390.46,2179.98 C30.2 ; U1.1@2396.45,3439.93 2365.41,3439.93 2326.32,3439.93 2304.89,3461.36 2161.8,3461.36 2125.78,3425.34 ; U1.15 2525.78,2548.07 2528.63,2545.22 ; C36.1 2635.42,2330.71 2635.42,2346.09 CAP10.2 2528.63,2545.22 ; U1.39 2801.22,3163.95 ; v1(2808.68,3203.48) 2801.22,3196.02 2801.22,3163.95 ; C33.1 2900.78,2355.09 2900.78,2419.05 ; U1.38 3034.98,3439.93 3018.89,3423.84 3018.89,3331.02 2851.82,3163.95 2801.22,3163.95 ; CAP8.2 3007.94,2437.56 CAP9.2 2979.43,2419.05 2900.78,2419.05 ; U4.3 3515.78,2862.58 3550.46,2827.9 C4.2@3640.78,2827.9 ; v1(3591.45,2206.15) 3651.22,2206.15 3655.78,2201.59 C5.1 3688.5,2170.84 3719,2201.34 3965.78,2201.34 C35.2 3996.14,2230.72 C34.1 4050.96,2230.71 4066.14,2230.71 4085.06,2211.79 BUZZER1.2 ; C46.2 3684.9,2895.72 3640.78,2851.6 C4.2@3640.78,2827.9 ; U12.4 U12.4@3963.46,3043.04 ; U11.1 4165.41,2164.46 BUZZER1.2 ; D15.1 D15.1@4202.71,2250.78 ; U10.2 4238.38,2330.4 4238.38,2271.07 4233.47,2266.16 4202.71,2266.16 D15.1@4202.71,2250.78 ; R69.2 R77.2 4066.98,3200.08 3963.46,3096.56 U12.4@3963.46,3043.04 ; SW1.C 4380.85,2880.04 4390.47,2880.04 C44.1@4390.47,2895.22 ; R73.2 4363.28,3025.08 ; C44.1 C44.1@4390.47,2895.22 ; C37.1 4363.28,2965.4 ; C48.2 4363.28,3025.08 ; C31.2 4405.78,2451.57 J1.3@4464.61,2510.4 ; J1.3 J1.3@4464.61,2510.4 ; D18.1@2111.69,3305.4 2121.14,3295.95 2121.14,3250.72 ; D18.1@2111.69,3305.4 2093.85,3305.4 2040.25,3305.4 2006.71,3338.94 2006.71,3430.4 C49.1 2046.76,3430.4 2065.47,3430.4 2070.53,3425.34 2125.78,3425.34 ; 2528.63,2545.22 2670.28,2545.22 CAP7.2 2796.45,2419.05 2900.78,2419.05 ; C4.2@3640.78,2827.9 3640.78,2824.37 C4.2 3640.78,2790.09 3663.14,2790.09 3805.78,2647.45 3805.78,2635.1 C29.2 3840.42,2605.72 3855.6,2605.72 C27.2 C26.2 3966.14,2605.72 R53.1 4005.78,2635.09 4292.5,2635.09 4305.03,2622.56 4305.03,2608.47 D14.1 4366.54,2608.47 J1.3@4464.61,2510.4 ; U12.4@3963.46,3043.04 4016.72,2989.78 4016.72,2960.4 4031.41,2960.4 R71.2 4356.09,2960.4 ; BUZZER1.2 4163.72,2211.79 D15.1@4202.71,2250.78 ; 4356.09,2960.4 4361.09,2965.4 4363.28,2965.4 ; 4356.09,2960.4 4356.09,2929.6 C44.1@4390.47,2895.22 ; 4363.28,2965.4 4363.28,3025.08
  Bottom Layer w10: J2.1 2125.78,3255.4 2125.78,3368.42 ; J5.1 2125.78,3368.42 ; U2.1 2528.63,2318.15 CAP10.2 2579.33,2452.88 2637.36,2510.91 2637.36,2943.08 2625.7,2954.74 ; LED2.K 2645.42,2965.71 2641.05,2970.09 ; v1(2808.68,3203.48) 2720.31,3115.11 ; LED7.K 2875.78,3056.33 2897.81,3056.33 2927.7,3026.44 2927.7,2902.35 2899.73,2874.38 2848.99,2874.38 2785.47,2937.9 2785.47,3049.95 2720.31,3115.11 ; CAP8.2 3474.35,2206.15 v1(3591.45,2206.15) ; BUZZER1.2 4448.74,2542.45 ; SW1.C SW1.C@4306.79,2794.97 ; SW1.1 4394.2,2882.38 SW1.C@4306.79,2794.97 ; J1.3 4448.74,2542.45 ; 2125.78,3368.42 2253.34,3368.42 2259.39,3374.47 2333.73,3374.47 2475.38,3232.82 LED1.K 2475.38,3071.42 2475.38,3056.73 2523.71,3056.73 2625.7,2954.74 ; 2625.7,2954.74 2641.05,2970.09 ; 2641.05,2970.09 2644.85,2973.89 2644.85,3108.04 2651.92,3115.11 2720.31,3115.11 ; SW1.C@4306.79,2794.97 4306.79,2684.39 4448.74,2542.45
GPIO0: Q3.3 U1.25 | length 111.5
  Top Layer w10: U1.25 3175.23,2789.93 3175.7,2790.4 Q3.3
I2C_SCL: U1.36
I2C_SDA: U1.33
J2_2: D1.2 J2.2 | length 95.8
  Top Layer w10: J2.2 2043.1,3010.4 2045.03,3012.33 D1.2
J2_3: C38.2 D16.2 J2.3 R68.2 R69.1 R72.2 | length 4427.4
  Top Layer w10: D16.2 4020.03,2692.33 4020.03,2711.19 4011.14,2720.08 C38.2 3980.78,2749.46 3958.75,2749.46 3925.78,2782.43 R68.2 3925.78,2864.46 3927.64,2866.32 4069.74,2866.32 v1(4072.28,2868.86) ; R69.1 4251.14,3260.71 R72.2 v1(4275.78,3297.25)
  Bottom Layer w10: J2.3 1943.4,2873.02 1943.4,2517.06 2249.49,2210.97 2249.49,2188.47 2350.95,2087.01 2401.01,2087.01 2412.52,2098.52 3593.37,2098.52 3756.59,2261.74 3756.59,2282.5 4246.57,2772.48 4246.57,2811.53 4130.76,2927.34 ; v1(4072.28,2868.86) 4130.76,2927.34 ; v1(4275.78,3297.25) 4275.78,3072.36 4130.76,2927.34
LED1_A: LED1.A R4.1 | length 59.4
  Bottom Layer w10: R4.1 2475.42,2995.44 2475.38,2995.48 LED1.A
LED2_A: LED2.A R56.1 | length 174.8
  Bottom Layer w10: LED2.A 2675.78,2934.46 2697.81,2934.46 2706.15,2942.8 2706.15,2993.95 2704.38,2995.72 2675.78,2995.72 R56.1
LED7_A: LED7.A R80.2 | length 179.4
  Bottom Layer w10: R80.2 2875.78,2934.46 2897.81,2934.46 2911.19,2947.84 2911.19,2989.67 2905.16,2995.7 2875.78,2995.7 LED7.A
MOSI: U1.37 U2.4 | length 1467.3
  Top Layer w10: v1(3022.4,2879.51) 2999.24,2902.67 2999.24,3256.03 3034.98,3291.77 3034.98,3389.93 U1.37
  Bottom Layer w10: U2.4 2674.74,2196.34 2674.74,2553.09 3001.16,2879.51 v1(3022.4,2879.51)
NTC_ADC: C60.1 J5.2 R102.1 S9.2 | length 352.8
  Top Layer w10: S9.2 2189.52,3219.04 2189.52,3280.16 2224.83,3315.47 2224.83,3350.28 2225.77,3351.22 ; J5.2 2225.78,3351.22 2226.09,3350.91 C60.1
  Bottom Layer w10: J5.2 2226.09,3405.71 R102.1
OLED_DC: U1.16 U2.6 | length 771
  Top Layer w10: U1.16 2575.78,2660.75 2575.78,2658.06 2604.72,2629.12 2614.41,2629.12 2709.65,2533.88 v1(2720.38,2533.88)
  Bottom Layer w10: v1(2720.38,2533.88) 2726.61,2540.11 2838.83,2540.11 2890.73,2488.21 U2.6
OLED_RES: U1.23 U2.5 | length 770.9
  Top Layer w10: v1(2725.95,2218.09) 2753.09,2218.09 U2.5 ; v1(2808.15,2653.74) 2815.16,2660.75 2925.78,2660.75 U1.23
  Bottom Layer w10: v1(2725.95,2218.09) 2690.83,2253.21 2690.83,2538.29 2806.28,2653.74 v1(2808.15,2653.74)
PGND: USB3.0 USB3.A1 USB3.A12 | length 818
  Top Layer w10: USB3.0@3329.84,3260.43 3329.84,3245.67 USB3.A12 ; USB3.0@3329.84,3425 USB3.0@3670,3425 ; USB3.A1 3670,3245.67 USB3.0@3670,3260.43
  Bottom Layer w10: USB3.0@3329.84,3260.43 USB3.0@3329.84,3425 ; USB3.0@3670,3260.43 USB3.0@3670,3425
POWER_ADC: C59.1 D21.2 R100.2 R101.1 S7.2 | length 481.1
  Top Layer w10: R100.2 2115.42,3190.08 C59.1 2145.78,3160.71 2161.16,3145.33 D21.2@2161.16,3128.47 ; D21.2 D21.2@2161.16,3128.47 ; S7.2 2218.06,3156.26 2196.51,3156.26 2193.58,3153.33 2193.58,3128.47 ; R101.1 2220.78,2940.09 2193.58,2967.29 2193.58,3128.47 ; D21.2@2161.16,3128.47 2176.54,3128.47 2193.58,3128.47
PWM_1: R81.1 U1.11 | length 637.6
  Top Layer w10: R81.1 2350.78,2432.41 2301.6,2481.59 2301.6,2915.21 2326.32,2939.93 U1.11@2396.45,2939.93
PWM_2: U1.12
PWM_LED: R4.2 U1.24 | length 765.4
  Top Layer w10: v1(2614.28,2652.2) 2687.63,2652.2 2711.13,2628.7 2943.73,2628.7 2975.78,2660.75 U1.24
  Bottom Layer w10: R4.2 2475.42,2876.06 2614.28,2737.2 v1(2614.28,2652.2)
Q1_1: Q1.1 R3.1 | length 307.3
  Top Layer w10: R3.1 3835.78,2328.15 3840.93,2323 Q1.1@4110.15,2323
Q1_2: BUZZER1.1 Q1.2 | length 167.2
  Top Layer w10: BUZZER1.1 4073.26,2399.01 4074.47,2397.8 Q1.2@4110.15,2397.8
Q9_4: D17.1 Q9.4 R83.1 R84.2 | length 250.2
  Top Layer w10: Q9.4 2138.1,2222.58 R84.2@2145.46,2215.22 ; R83.1 R83.1@2141.09,2185.54 ; R84.2 R84.2@2145.46,2215.22 ; D17.1@2198.85,2100.4 2198.85,2131.16 2195.47,2131.16 R83.1@2141.09,2185.54 ; R83.1@2141.09,2185.54 2141.09,2195.67 2145.46,2200.04 R84.2@2145.46,2215.22
Q9_5: J2.4 Q9.5 Q9.6 Q9.7 Q9.8 R66.1 R80.1 | length 5763.6
  Top Layer w10: Q9.8 Q9.8@1988.1,2535.59 ; Q9.7 Q9.7@2038.1,2525.93 ; Q9.7@2038.1,2535.59 Q9.7@2038.1,2525.93 ; Q9.5@2063.1,2436.54 2063.1,2500.93 Q9.7@2038.1,2525.93 ; Q9.6 Q9.6@2088.1,2535.59 ; v1(4071.55,2735.54) 4085.42,2721.67 4085.42,2720.09 R66.1
  Top Layer w59.05: Q9.8 1988.1,2803.08 ccw(c1980.78,2803.08) J2.4 ; Q9.7 2038.1,2753.08 ccw(c1980.78,2753.08) J2.4 ; Q9.6 2088.1,2703.08 ccw(c1980.78,2703.08) J2.4 ; Q9.5@2138.1,2516.27 2138.1,2653.08 ccw(c1980.78,2653.08) J2.4
  Bottom Layer w10: J2.4 1980.78,2502.71 2265.58,2217.91 2265.58,2195.14 2357.62,2103.1 2394.34,2103.1 2410.01,2118.77 2893.14,2118.77 2935.84,2161.47 2935.84,2431.17 2987.15,2482.48 3022.85,2482.48 3046.66,2458.67 3104.39,2458.67 3152.79,2507.07 3152.79,2514.41 3241.74,2603.36 3298.65,2603.36 3602.57,2907.28 ; R80.1 2845.41,2996.08 2845.41,3113.47 2850.76,3118.82 3423.44,3118.82 3602.57,2939.69 3602.57,2907.28 ; v1(4071.55,2735.54) 3899.81,2907.28 3602.57,2907.28
Q10_1: Q10.1 R81.2 R82.2 | length 136.3
  Top Layer w10: R82.2 2286.1,2382.37 2293.18,2375.29 Q10.1@2293.18,2342.4 ; Q10.1 Q10.1@2293.18,2342.4 ; R81.2 Q10.1@2293.18,2342.4
Q10_3: Q10.3 R84.1 | length 98.4
  Top Layer w10: R84.1 2235.47,2230.4 2235.47,2225.82 2255.78,2205.51 Q10.3
R15_1: Q3.1 R15.1 | length 98.1
  Top Layer w10: Q3.1@3295.15,2753 3330.83,2753 3336.73,2758.9 R15.1
R16_1: Q4.1 R16.1 | length 132.5
  Top Layer w10: Q4.1@3315.15,3033 3350.83,3033 3358.06,3025.77 3358.06,2971.9 R16.1
R53_2: R53.2 R54.1 U10.3 | length 408.2
  Top Layer w10: R54.1 R54.1@4005.78,2475.4 ; R53.2 4005.78,2515.7 R54.1@4005.78,2475.4 ; U10.3 4172.94,2293 4172.94,2392.63 4090.17,2475.4 R54.1@4005.78,2475.4
R75_2: R75.2 R76.2 U12.6 | length 573.7
  Top Layer w10: U12.6 3901.26,3257.35 3968.31,3324.4 4093.46,3324.4 4100.05,3317.81 4262.09,3317.81 4266.74,3322.46 4293.76,3322.46 4330.46,3285.76 R76.2 4330.46,3240.22 4330.46,3225.04 4335.78,3219.72 R75.2
R85_1: D1.1 R85.1 | length 132.6
  Top Layer w10: R85.1 2021.09,3152.41 2045.03,3128.47 D1.1
R_BUTTON: SW1.2 U1.9 | length 2052.2
  Top Layer w10: U1.9@2396.45,3039.93 2466.57,3039.93 2466.57,3092.68 2685.04,3311.15 v1(2963.22,3311.15)
  Bottom Layer w10: v1(2963.22,3311.15) 3066.34,3208.03 4039.55,3208.03 SW1.2
ROTARY_A: SW1.B U1.13 | length 2884.6
  Top Layer w10: U1.13@2396.45,2839.93 2326.32,2839.93 2317.69,2831.3 2317.69,2493.74 2440.74,2370.69 2440.74,2161.96 2470.49,2132.21 v1(3592.5,2132.21)
  Bottom Layer w10: v1(3592.5,2132.21) 3600.25,2132.21 3740.5,2272.46 3740.5,2289.17 4197.35,2746.02 SW1.B
ROTARY_B: SW1.A U1.14 | length 2399.3
  Top Layer w10: U1.14@2396.45,2789.93 2466.57,2789.93 2653.16,2976.52 v1(2815.23,2976.52) ; v1(4160.3,2746.79) 4346.02,2746.79 SW1.A
  Bottom Layer w10: v1(2815.23,2976.52) 2815.23,3106.7 2845.47,3136.94 3770.15,3136.94 v1(4160.3,2746.79)
RTX: Q4.2 R15.2 U4.4 | length 462.3
  Top Layer w10: Q4.2@3315.15,3107.8 3350.83,3107.8 3496.09,2962.54 U4.4 3496.09,2864.1 3453.88,2821.89 R15.2
RX0: R18.2 U1.34 | length 1082.1
  Top Layer w10: v1(3025.88,3095.39) 3025.88,3230.83 3034.98,3239.93 U1.34 ; v1(3344.11,2789.67) 3417,2789.67 3423.51,2783.16 3423.51,2667.11 3406.26,2649.86 3406.26,2606.84 3413.44,2599.66 3525.78,2599.66 R18.2
  Bottom Layer w10: v1(3025.88,3095.39) 3038.39,3095.39 v1(3344.11,2789.67)
RX2: U1.27
SCLK: U1.30 U2.3 | length 1434.9
  Top Layer w10: v1(2665.54,2611.85) 3096.28,2611.85 v1(3105.09,2620.66) ; v1(3027.22,3039.93) 3034.98,3039.93 U1.30
  Bottom Layer w10: U2.3 2658.27,2247.99 2658.27,2604.58 v1(2665.54,2611.85) ; v1(3027.22,3039.93) 3105.09,2962.06 v1(3105.09,2620.66)
SW: C49.2 D18.2 R85.2 R86.2 U1.26 | length 1731.3
  Top Layer w10: R85.2 1960.46,3303.53 D18.2@1977.71,3320.78 ; D18.2 D18.2@1977.71,3320.78 ; v1(2278,3487.38) 2032.44,3487.38 C49.2 R86.2 1975.46,3338.41 1977.71,3336.16 D18.2@1977.71,3320.78 ; v1(2605.68,3029.21) 2838.9,3029.21 3028.18,2839.93 3034.98,2839.93 U1.26
  Bottom Layer w10: v1(2278,3487.38) 2605.68,3159.7 v1(2605.68,3029.21)
TIP_ADC: C46.1 R78.1 S6.2 | length 2476.3
  Top Layer w10: S6.2 2218.06,3281.26 v1(2286.3,3281.26) ; v1(2340.77,2725.22) 2426.6,2725.22 2466.57,2765.19 2466.57,2767.16 2500.41,2801 3000.63,2801 3008.68,2792.95 3008.68,2759.49 3211.57,2556.6 v1(3272.46,2556.6) ; v1(3755.04,2835.09) C46.1 R78.1
  Bottom Layer w10: v1(2286.3,3281.26) 2286.3,2779.69 v1(2340.77,2725.22) ; v1(3272.46,2556.6) 3476.55,2556.6 v1(3755.04,2835.09)
TTL_DM: U4.2 USB3.A7 USB3.B7 | length 861.8
  Top Layer w10: USB3.A7 3490.08,3041.85 3535.46,2996.47 U4.2 3535.46,2868.19 3544.05,2859.6 3606.08,2859.6 3675.8,2929.32 3675.8,2985.28 3529.45,3131.63 USB3.B7
TTL_DP: U4.1 USB3.A6 USB3.B6 | length 478.8
  Top Layer w10: USB3.B6 3470.39,3263.82 3509.76,3263.82 USB3.A6 3509.76,3081.45 3555.15,3036.06 U4.1
TX0: R19.2 U1.35 | length 922.4
  Top Layer w10: U1.35 3175.23,3289.93 3175.23,2889.65 3256.24,2808.64 3256.24,2725.73 3413.06,2568.91 R19.2
TX2: U1.28
U1_5: S6.1 U1.5 | length 147.2
  Top Layer w10: S6.1 2263.87,3239.93 U1.5@2396.45,3239.93
U1_6: S9.1 U1.6 | length 186.3
  Top Layer w10: S9.1 2253.5,3159.55 2276.38,3159.55 2306.76,3189.93 U1.6@2396.45,3189.93
U1_7: S7.1 U1.7 | length 149
  Top Layer w10: S7.1 2268.13,3139.93 U1.7@2396.45,3139.93
U1_8: S8.1 U1.8 | length 174.2
  Top Layer w10: S8.1 2253.5,3091.06 2325.19,3091.06 2326.32,3089.93 U1.8@2396.45,3089.93
U4_8: R19.1 U4.8 | length 152.4
  Top Layer w10: R19.1 3445.78,2662.65 3476.53,2662.65 3515.78,2701.9 U4.8
U4_9: R18.1 U4.9 | length 109.4
  Top Layer w10: R18.1 3525.78,2662.65 3535.46,2672.33 U4.9
U4_10: C4.1 U4.10 | length 90.9
  Top Layer w10: U4.10 3595.42,2737.33 3608.06,2749.97 C4.1
U10_6: C32.1 D14.2 L3.1 U10.6 | length 319
  Top Layer w10: L3.1 4254.52,2480.28 4301.09,2480.28 ; U10.6 4283.18,2367.8 4283.18,2384.72 4285.94,2387.48 4285.94,2388.85 4292.13,2395.04 4301.09,2395.04 C32.1 4301.09,2480.28 ; D14.2 4305.03,2492.33 4305.03,2484.22 4301.09,2480.28
U12_1: R67.2 R78.2 U12.1 | length 193.3
  Top Layer w10: U12.1 3801.26,3000.22 3841.08,2960.4 R67.2 3870.46,2930.04 3870.78,2929.72 R78.2
U12_2: R67.1 R68.1 U12.2 | length 200
  Top Layer w10: U12.2 3851.26,3035.44 3901.71,2984.99 3901.71,2960.4 R67.1 3931.09,2930.04 3926.14,2925.09 3925.78,2925.09 R68.1
U12_3: R70.2 R71.1 U12.3 | length 189.5
  Top Layer w10: U12.3 3901.26,3035.55 3940.28,2996.53 3949.34,2996.53 R71.1 3985.47,2929.79 3980.78,2925.1 R70.2
U12_5: R74.2 R77.1 U12.5 | length 249.8
  Top Layer w10: U12.5 3964.84,3261.34 4025.78,3261.34 ; R74.2 4025.78,3261.34 ; R77.1 4135.42,3260.71 4134.79,3261.34 4025.78,3261.34
U12_7: R76.1 R79.2 U12.7 | length 746.7
  Top Layer w10: U12.7 3851.26,3256.48 4008.18,3413.4 4225.74,3413.4 4361.71,3277.43 4361.71,3255.4 R76.1 4391.09,3225.04 4390.78,3224.73 R79.2
VBUS: D5.1 USB3.A4 USB3.A9 | length 467.9
  Top Layer w10: USB3.A9 3403.46,3263.82 3419.55,3279.91 3580.29,3279.91 3596.38,3263.82 USB3.A4 3596.38,3143.26 3619.54,3143.26 3635.78,3127.02 D5.1
VIN: C30.1 C31.1 D17.2 J1.1 Q9.1 Q9.2 Q9.3 R83.2 R101.2 U10.4 U10.5 | length 4942.6
  Top Layer w10: Q9.2 Q9.2@2038.1,2313.85 ; Q9.3 2088.1,2304.19 2088.1,2313.85 2088.1,2333.16 2151.18,2333.16 2191.4,2373.38 2191.4,2791.32 2220.78,2820.7 R101.2 ; C30.1@2436.4,2095.4 C30.1 ; U10.4 4348.62,2293 4348.62,2310.09 ; U10.5 4348.62,2330.4 4348.62,2310.09 ; J1.1 4436.45,2310.4 4436.14,2310.09 C31.1 4375.42,2310.09 4348.62,2310.09
  Top Layer w19.68: U10.4 U10.5 ; 4315.9,2311.5 4479.68,2311.5 cw(c4479.68,2310.4) J1.1
  Top Layer w59.05: R83.2 cw(c2080.46,2267.76) 1988.1,2267.76 Q9.1 ; D17.2 cw(c2082.71,2195.01) 1988.1,2195.01 ; Q9.3 Q9.1 ; C30.1 ccw(c2586.49,2095.4) 2586.49,1960 2749.43,1960 ; J1.1 4480.78,2075.78 cw(c4365,2075.78) 4365,1960 2223.11,1960 cw(c2223.11,2195.01) 1988.1,2195.01 ; 1988.1,2195.01 Q9.1
pads on no net: J1.2 J1.4 SW1.MT1 SW1.MT2 U1.4 U1.17 U1.18 U1.19 U1.20 U1.21 U1.22 U1.31 U1.32 U4.6 USB3.A8 USB3.B8 USB3.G

## Polygon pours and split planes (outlines as drawn)
GND on Bottom Layer (solid): 1830,3735 ccw(c1830,3405) 1500,3405 1500,1500 cw(c1515,1500) 1515,1515 5190,1515 cw(c5190,1570) 5135,1570 5135,3745 cw(c5135,3755) 5125,3755 5125,3845
GND on Top Layer (solid): 1845,3580 cw(c1715,3580) 1715,3450 1610,3450 cw(c1610,3390) 1670,3390 1670,1735 ccw(c1690,1735) 1690,1715 4965,1715 cw(c4965,1855) 4825,1855 4825,3600 cw(c4820,3600) 4820,3595 4805,3595

## Keep-outs
Keep-Out Layer:
  lines w10: 1771.89,1993.62 ccw(c1870.32,1993.62) 1870.32,1895.2 ; 1771.89,3410.95 cw(c1870.32,3410.95) 1870.32,3509.37 ; 4626.22,1895.2 ccw(c4626.22,1993.62) 4724.65,1993.62 ; 4626.22,3509.37 cw(c4626.22,3410.95) 4724.65,3410.95

## Text inside footprints (layer, text, board x,y; h text height)
U2: Bottom Overlay "0.96'OLED" at 2533.43,2518.87 h47.24 r180; Bottom Overlay "4SPI-Connector" at 2434.83,2607.37 h47.24 r180; Bottom Overlay "CS" at 3013.8,2335.01 h39.37 r90; Bottom Overlay "DC" at 2915.32,2335.01 h39.37 r90; Bottom Overlay "RES" at 2816.91,2335.01 h39.37 r90; Bottom Overlay "D1" at 2728.61,2335.01 h39.37 r90; Bottom Overlay "D0" at 2610.22,2335.01 h39.37 r90; Bottom Overlay "VCC" at 2511.82,2335.01 h39.37 r90; Bottom Overlay "GND" at 2413.32,2335.01 h39.37 r90